# Altium PCB PCB.PcbDoc (part 1 of 2)
Units mm, origin at the board's own origin, x right, y up, seen from the top; angles counter-clockwise.
Board outline 50 x 50 mm, 8 copper layers (Top Layer, Int1, Int2, Int3, Int4, Int5, Int6, Bottom Layer), stack 1.511 mm thick; 61 components, 338 nets, 626 pads, 186 vias.
Unrouted connection lines stored in the file: 201.
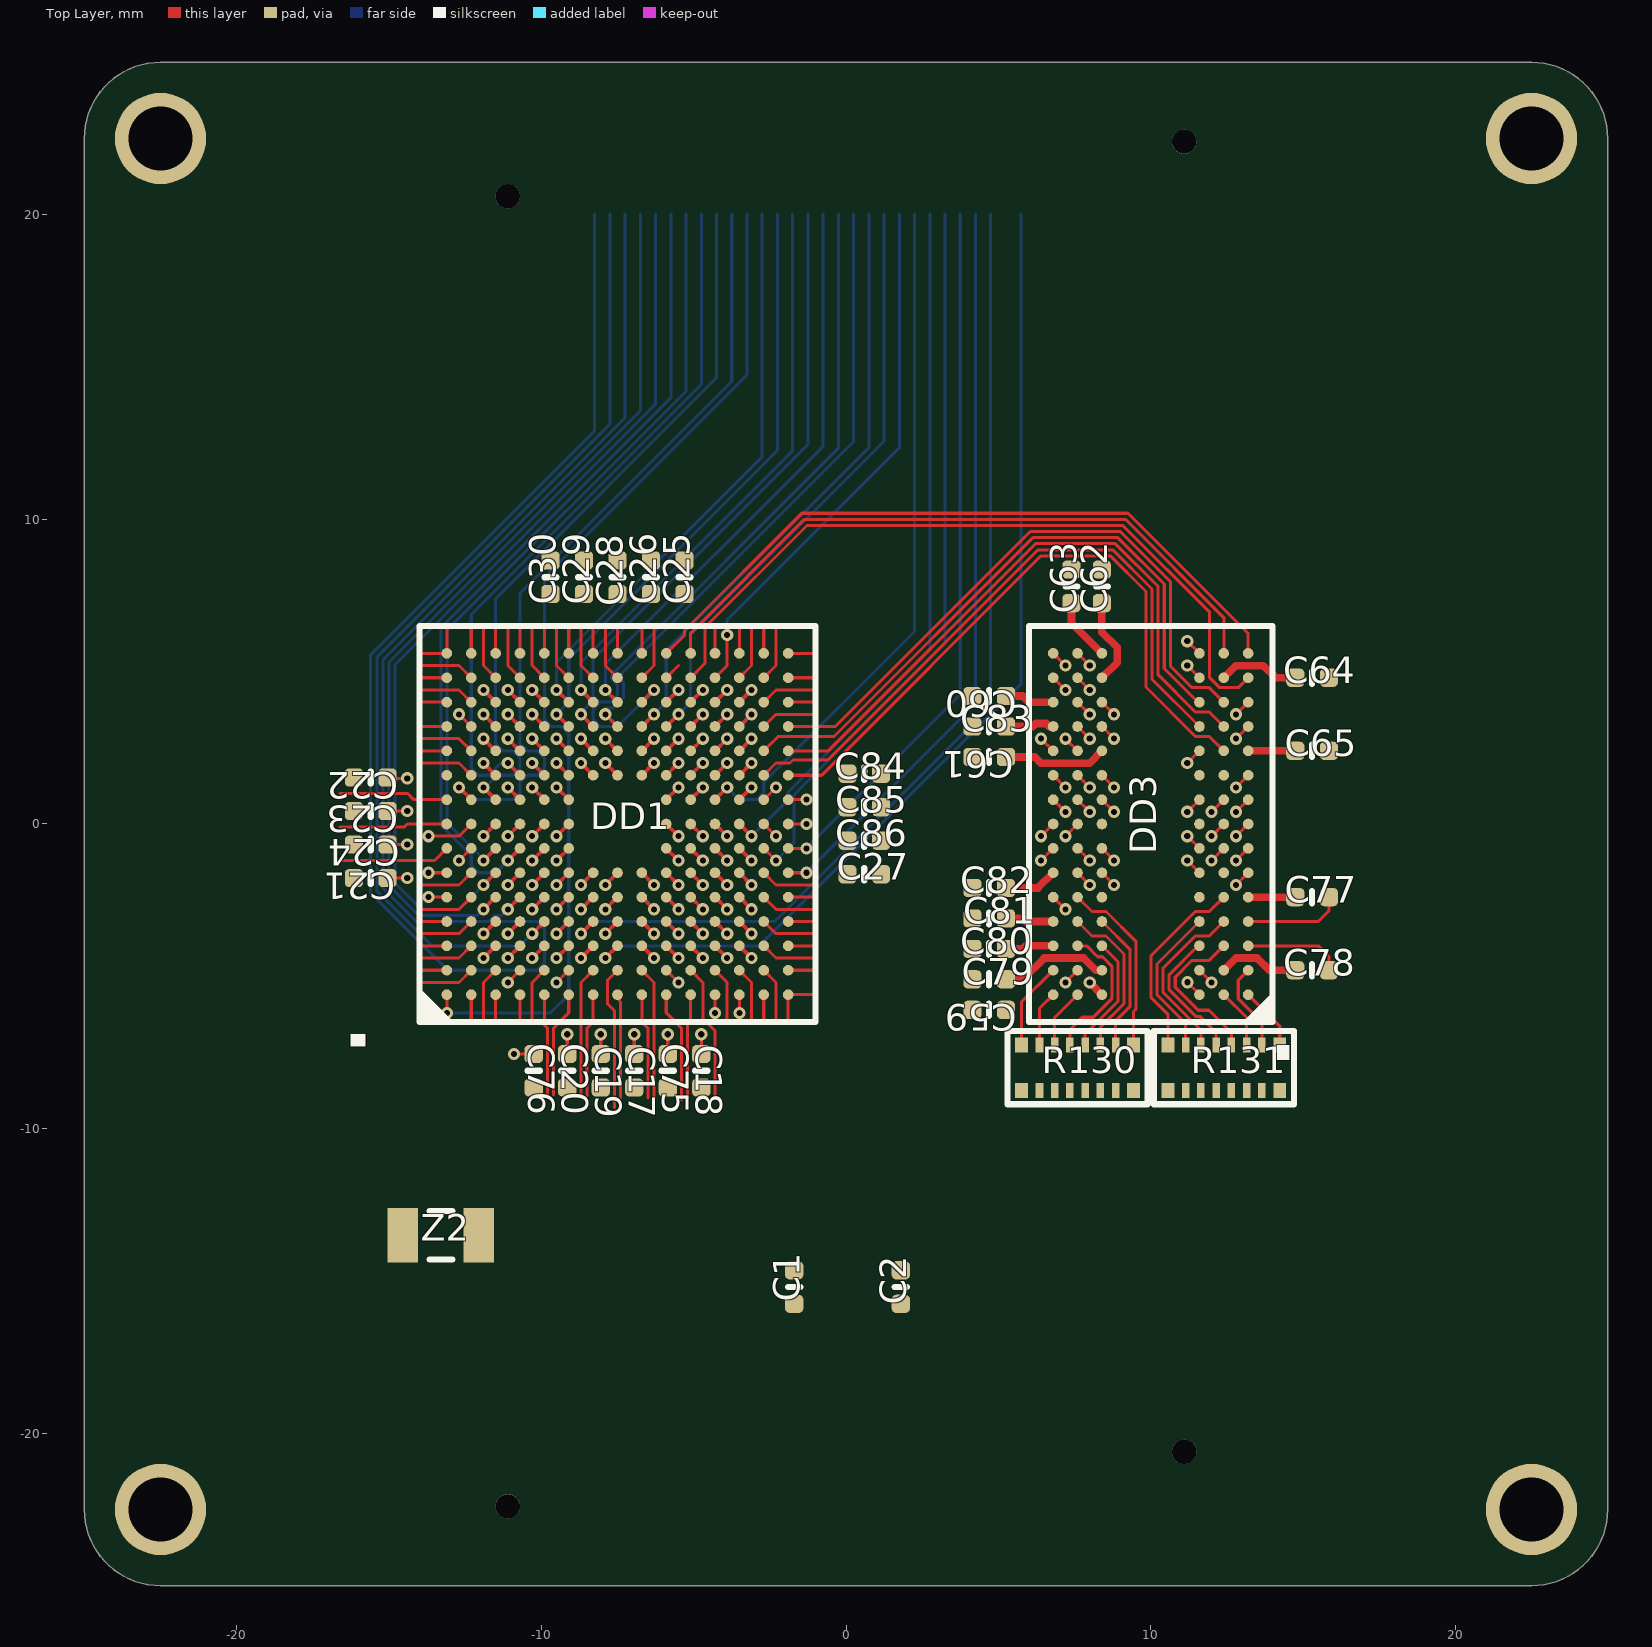
[diagram p0: Top Layer view]
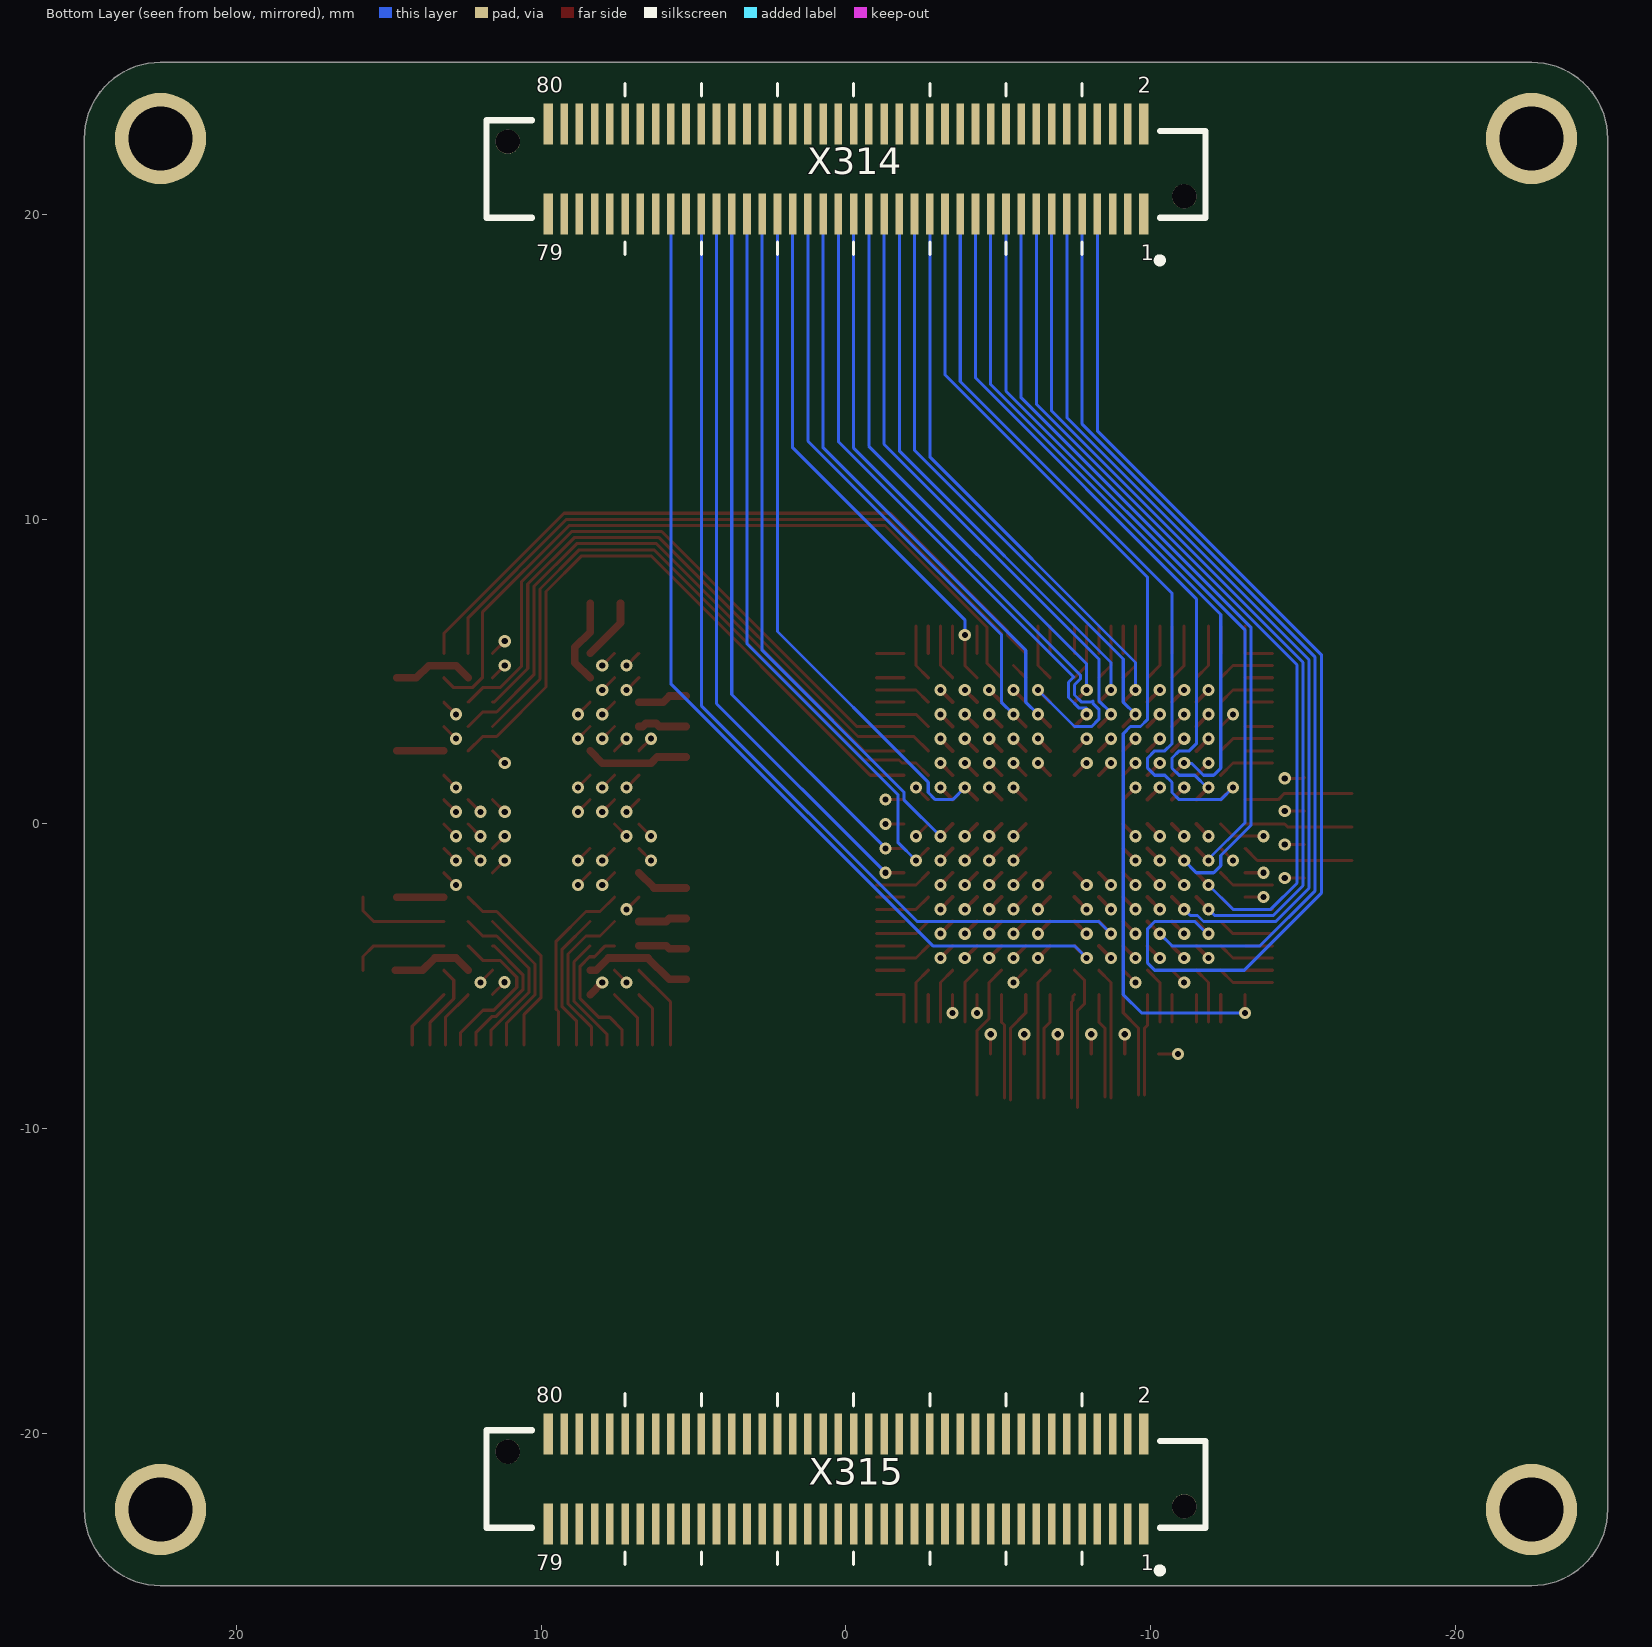
[diagram p1: Bottom Layer view, seen from below]
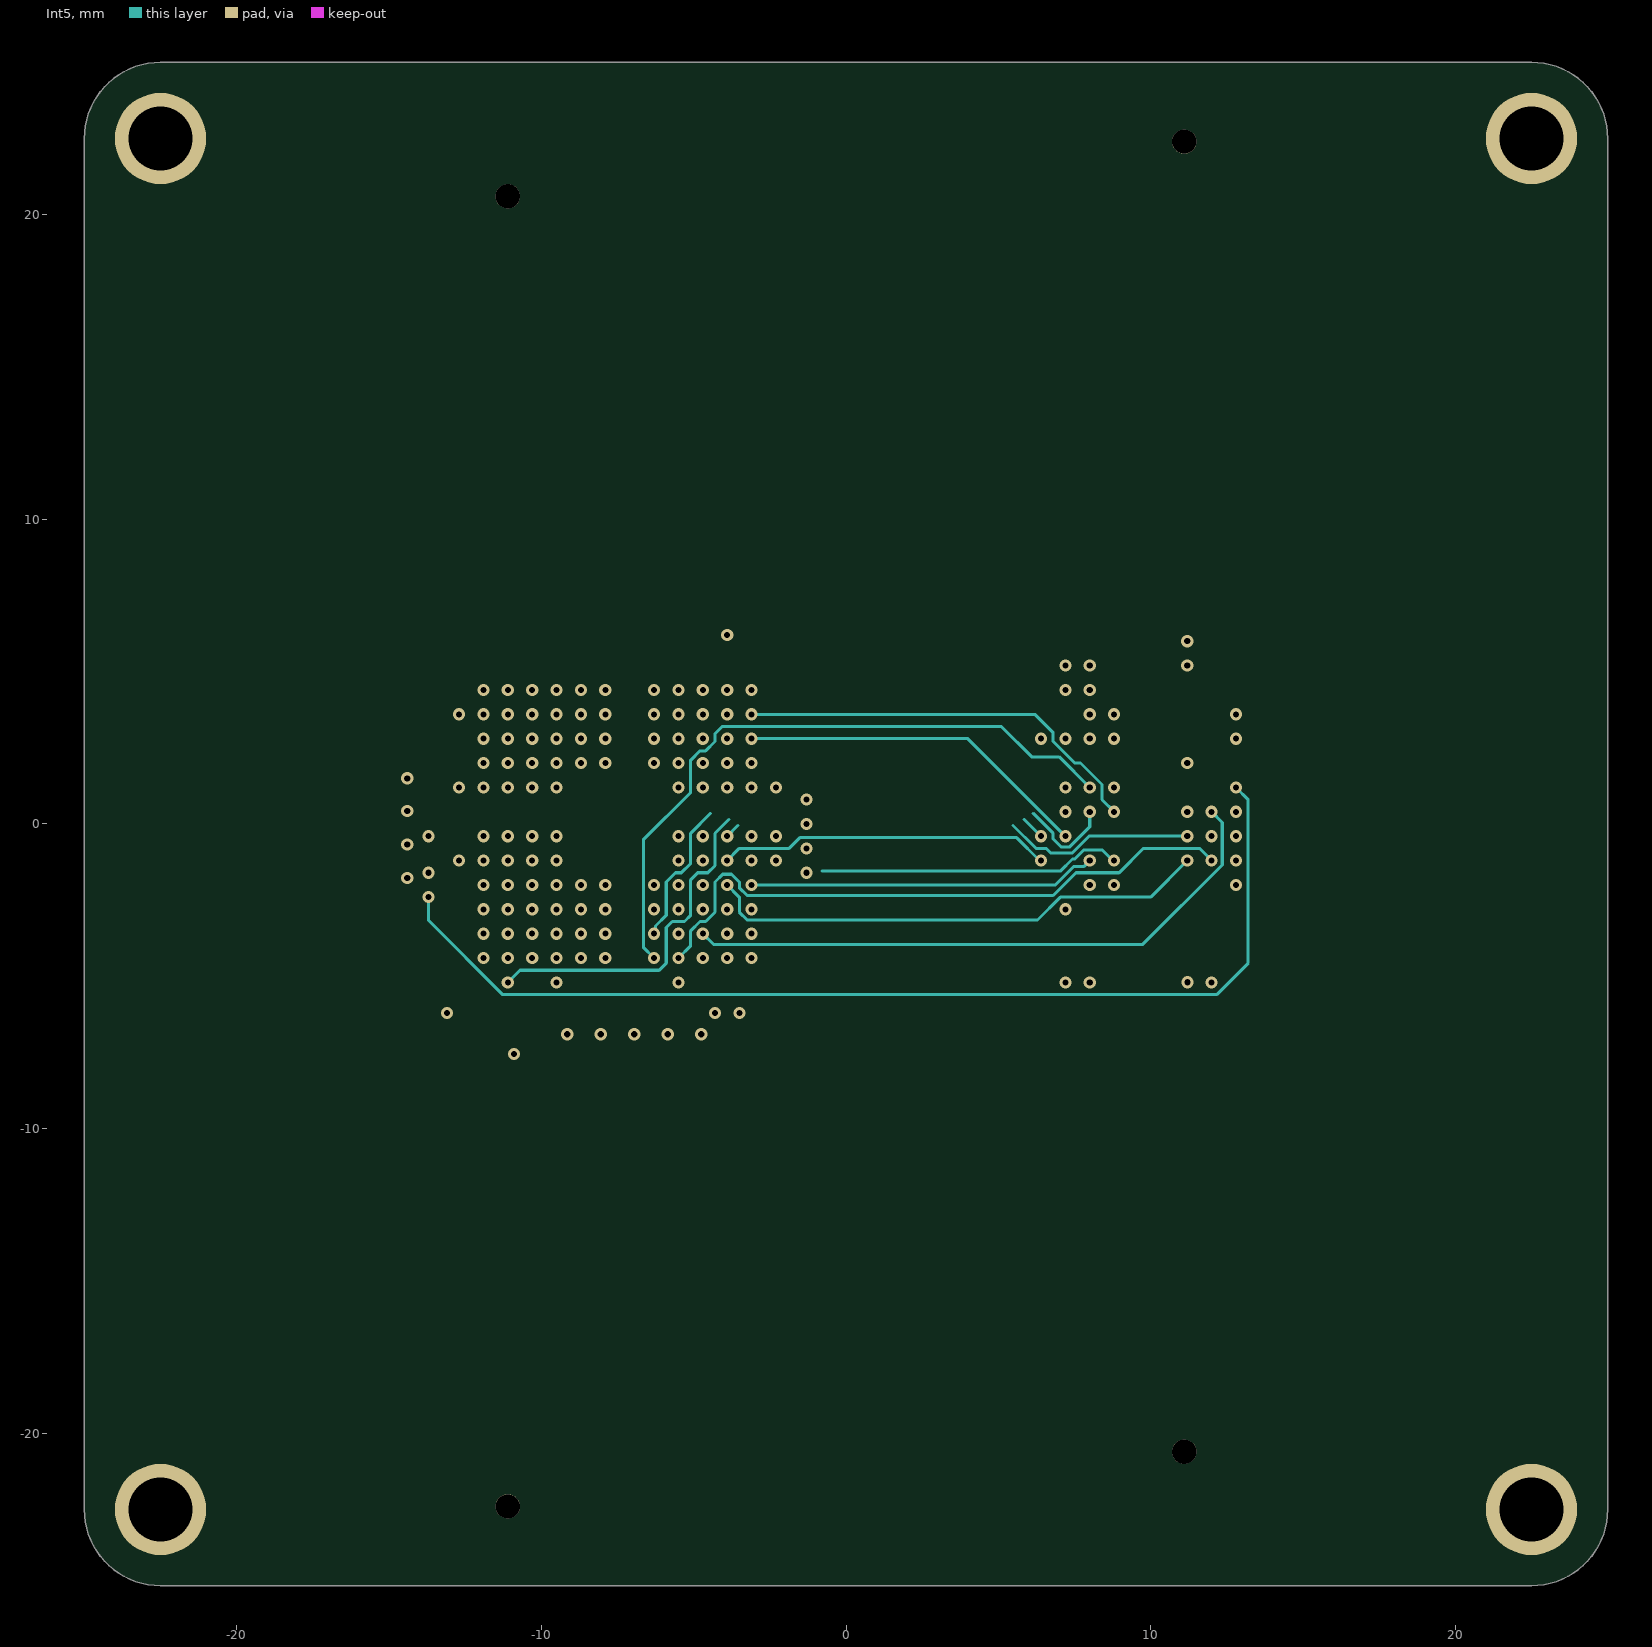
[diagram p2: Int5]

## Layer stack, top to bottom
Top Solder: solder mask 0.0254, SM-001, Dk 3.5
Top Layer: signal copper 0.018
PP1: prepreg 0.1168, PP-016, Dk 4.4
Int1: signal copper 0.018
Core1: core 0.3, FR4 Tg150, Dk 4.6
Int2: signal copper 0.018
Dielectric 1: prepreg 0.1168, PP-016, Dk 4.4
Int3: signal copper 0.018
Core2: core 0.3, FR4 Tg150, Dk 4.6
Int4: signal copper 0.018
Dielectric 2: prepreg 0.1168, PP-016, Dk 4.4
Int5: signal copper 0.018
Core3: core 0.3, FR4 Tg150, Dk 4.6
Int6: signal copper 0.018
PP4: prepreg 0.1168, PP-016, Dk 4.4
Bottom Layer: signal copper 0.018
Bottom Solder: solder mask 0.0254, SM-001, Dk 3.5

## Board outline
-25,-22.5 -25,22.5 cw(c-22.5,22.5) -22.5,25 22.5,25 cw(c22.5,22.5) 25,22.5 25,-22.5 cw(c22.5,-22.5) 22.5,-25 -22.5,-25 cw(c-22.5,-22.5)

## Design rules (kind name [scope] priority, off if disabled: settings)
AcuteAngle [All] p1: minimum=3.50000000000000E+0001 checktracksonly=FALSE
BoardOutlineClearance "BoardOutlineClearance 1" [All] p1: gap=0.25 ignorepadtopadclearanceinfootprint=FALSE except(0: Arc-SplitContinuation Track-SplitContinuation SMDPad-SplitContinuation THPad-SplitContinuation Via-SplitContinuation Fill-SplitContinuation Poly-SplitContinuation Region-SplitContinuation Text-SplitContinuation) // Milling
BoardOutlineClearance "BoardOutlineClearance 2" [All] p2: gap=0.4 ignorepadtopadclearanceinfootprint=FALSE except(0: Arc-SplitContinuation Track-SplitContinuation SMDPad-SplitContinuation THPad-SplitContinuation Via-SplitContinuation Fill-SplitContinuation Poly-SplitContinuation Region-SplitContinuation Text-SplitContinuation) // V-Cut
Clearance "Clearance-2 1/2 Oz" [All] p1: gap=0.1 ignorepadtopadclearanceinfootprint=FALSE except(0.15: Arc-Fill Arc-Poly Track-Fill Track-Poly SMDPad-SMDPad SMDPad-Fill SMDPad-Poly THPad-Fill THPad-Poly Via-Fill Via-Poly Fill-Fill Fill-Poly Poly-Poly Poly-Region Poly-Text; 0.25: Arc-Hole Track-Hole SMDPad-Hole THPad-Hole Via-Hole Fill-Hole Poly-Hole Region-Hole Text-Hole) // Advance
DiffPairsRouting "DiffPairsRouting 1/2 Oz" [All] p1: maxlimit=0.254 minlimit=0.1 mostfreqgap=0.254 toplayer_minwidth=0.1 toplayer_maxwidth=0.381 toplayer_prefwidth=0.381 midlayer1_minwidth=0.1 midlayer1_maxwidth=0.381 midlayer1_prefwidth=0.381 midlayer2_minwidth=0.1 midlayer2_maxwidth=0.381 midlayer2_prefwidth=0.381 midlayer3_minwidth=0.1 midlayer3_maxwidth=0.381 midlayer3_prefwidth=0.381 midlayer4_minwidth=0.1 midlayer4_maxwidth=0.381 midlayer4_prefwidth=0.381 midlayer5_minwidth=0.1 midlayer5_maxwidth=0.381 midlayer5_prefwidth=0.381 midlayer6_minwidth=0.1 midlayer6_maxwidth=0.381 midlayer6_prefwidth=0.381 bottomlayer_minwidth=0.1 bottomlayer_maxwidth=0.381 bottomlayer_prefwidth=0.381 maxuncoupledlength=12.7
FanoutControl Fanout_BGA [IsBGA] p1: bgadir=Out bgaviamode=Centered fanoutstyle=BGA fanoutdirection=Alternating viagrid=0.025 // Fanout_BGA (Default Rule)
HoleSize "Minimum HoleSize" [IsPad] p1: absolutevalues=TRUE maxlimit=5.9 minlimit=0.6 maxpercent=80.000 minpercent=20.000
HoleSize "Minimum HoleSize VIA 2" [IsVia] p2: absolutevalues=TRUE maxlimit=5.9 minlimit=0.2 maxpercent=80.000 minpercent=20.000 // Advance
HoleToHoleClearance Hole2HoleClearance [All] p1: gap=0.25 allowstackedmicrovias=FALSE
MatchedLengths "Schematic Matched Net Lengths_5" [InNetClass('SDRAM_DQM0')] p1: tolerance=25.4 checknetsindiffpair=FALSE checkdiffpairvsdiffpair=TRUE checkxsignals=TRUE checkothers=TRUE usedelayunits=TRUE delaytolerance=10.000000
MatchedLengths "Schematic Matched Net Lengths_4" [InNetClass('SDRAM_DQM1')] p2: tolerance=25.4 checknetsindiffpair=FALSE checkdiffpairvsdiffpair=TRUE checkxsignals=TRUE checkothers=TRUE usedelayunits=TRUE delaytolerance=10.000000
MatchedLengths "Schematic Matched Net Lengths_1" [InNetClass('SDRAM_CTRL')] p3: tolerance=25.4 checknetsindiffpair=FALSE checkdiffpairvsdiffpair=TRUE checkxsignals=TRUE checkothers=TRUE usedelayunits=TRUE delaytolerance=10.000000
MatchedLengths "Schematic Matched Net Lengths" [InNetClass('SDRAM_CTRL')] p4: tolerance=25.4 checknetsindiffpair=FALSE checkdiffpairvsdiffpair=TRUE checkxsignals=TRUE checkothers=TRUE usedelayunits=TRUE delaytolerance=10.000000
MinimumAnnularRing "Minimum AR VIA Advance" [IsVia] p1: minimumring=0.1
MinimumAnnularRing "Minimum AR PAD Advance" [IsPAD] p2: minimumring=0.15
MinimumSolderMaskSliver "SolderMask Bridge Advance" [All] p1: minsoldermaskwidth=0.1 // Mask LDI
PlaneClearance "PlaneClearance-2 1/2 Oz" [All] p1: clearance=0.15 // Advance
PlaneConnect "TermalConnect-2 1/2 Oz" [All] p1: pad.planeconnectstyle=Relief pad.reliefexpansion=0.15 pad.reliefentries=4 pad.reliefconductorwidth=0.15 pad.reliefairgap=0.15 via.planeconnectstyle=Direct via.reliefexpansion=0.15 via.reliefentries=4 via.reliefconductorwidth=0.15 via.reliefairgap=0.15 // Advance
PolygonConnect "PolygonConnect-2 1/2 Oz" [All] p1: thpad.connectstyle=Relief thpad.reliefconductorwidth=0.125 thpad.reliefentries=4 thpad.polygonreliefangle="90 Angle" thpad.airgapwidth=0.15 smdpad.connectstyle=Relief smdpad.reliefconductorwidth=0.125 smdpad.reliefentries=4 smdpad.polygonreliefangle="90 Angle" smdpad.airgapwidth=0.15 via.connectstyle=Direct via.reliefconductorwidth=0.254 via.reliefentries=4 via.polygonreliefangle="90 Angle" via.airgapwidth=0.254 // Advance
RoutingCorners [All] p1 off: cornerstyle=Round minsetback=1 maxsetback=10
RoutingLayers RoutingLayers_SDRAM_ADDR [InNetClass('FMC_A[0..11]')] p1: top layer_v5=FALSE mid layer 1_v5=FALSE mid layer 2_v5=FALSE mid layer 3_v5=FALSE mid layer 4_v5=FALSE mid layer 5_v5=TRUE mid layer 6_v5=TRUE bottom layer_v5=TRUE
RoutingLayers [All] p2: top layer_v5=TRUE mid layer 1_v5=TRUE mid layer 2_v5=TRUE mid layer 3_v5=TRUE mid layer 4_v5=TRUE mid layer 5_v5=TRUE mid layer 6_v5=TRUE bottom layer_v5=TRUE
RoutingVias [All] p1: holewidth=0.2 width=0.4 viastyle="Through Hole" minholewidth=0.2 minwidth=0.4 maxholewidth=5.9 maxwidth=6.4
SilkToSilkClearance Silk2SilkClearance [All] p1 off: silktosilkclearance=0.15
SilkToSolderMaskClearance Silk2SolderMaskClearance [IsPad] p1 off: minsilkscreentomaskgap=0.15 clearancetoexposedcopper=TRUE
SolderMaskExpansion "SolderMaskExpansion LDI" [All] p1: expansion=0.025 istentingtop=FALSE // Advance
SupplyNets "Schematic Supply Nets_14" [InNet('+VBAT_ST')] p1: voltage=0.000
SupplyNets "Schematic Supply Nets_11" [InNet('GND')] p2: voltage=0.000
SupplyNets "Schematic Supply Nets_10" [InNet('+VREF')] p3: voltage=0.000
SupplyNets "Schematic Supply Nets_3" [InNet('+VDDA')] p4: voltage=0.000
SupplyNets "Schematic Supply Nets_1" [InNet('+3V3')] p5: voltage=0.000
SupplyNets "Schematic Supply Nets" [InNet('+3V3_A')] p6: voltage=0.000
UnRoutedNet [All] p1: checkbadconnections=TRUE
Width "Width 1/2 Oz" [All] p1: maxlimit=10 minlimit=0.1 preferedwidth=0.1
18 further rules are at their usual default settings.

## Classes and differential pairs
net class LTDC_R[0..7]: LTDC_R0 LTDC_R1 LTDC_R2 LTDC_R3 LTDC_R4 LTDC_R5 LTDC_R6 LTDC_R7
net class LTDC_G[0..7]: LTDC_G0 LTDC_G1 LTDC_G2 LTDC_G3 LTDC_G4 LTDC_G5 LTDC_G6 LTDC_G7
net class LTDC_B[0..7]: LTDC_B0 LTDC_B1 LTDC_B2 LTDC_B3 LTDC_B4 LTDC_B5 LTDC_B6 LTDC_B7
component class Connectors: X314 X315
net class FMC_NBL[0..1]: FMC_NBL0 FMC_NBL1
net class SDRAM_DQM1: FMC_D8 FMC_D9 FMC_D10 FMC_D11 FMC_D12 FMC_D13 FMC_D14 FMC_D15 FMC_NBL1
net class SDRAM_DQM0: FMC_D0 FMC_D1 FMC_D2 FMC_D3 FMC_D4 FMC_D5 FMC_D6 FMC_D7 FMC_NBL0
net class SDRAM_CTRL: FMC_A0 FMC_A1 FMC_A2 FMC_A3 FMC_A4 FMC_A5 FMC_A6 FMC_A7 FMC_A8 FMC_A9 FMC_A10 FMC_A11 FMC_BA0 FMC_BA1 FMC_CLK FMC_NCAS FMC_NRAS FMC_NWE FMC_SDCKE0 FMC_SDNE0
net class RGB888: LTDC_B0 LTDC_B1 LTDC_B2 LTDC_B3 LTDC_B4 LTDC_B5 LTDC_B6 LTDC_B7 LTDC_G0 LTDC_G1 LTDC_G2 LTDC_G3 LTDC_G4 LTDC_G5 LTDC_G6 LTDC_G7 LTDC_R0 LTDC_R1 LTDC_R2 LTDC_R3 LTDC_R4 LTDC_R5 LTDC_R6 LTDC_R7 PI9 PI10 PI14 PK7
net class SDMMC_D[0..3]: SDMMC_D0 SDMMC_D1 SDMMC_D2 SDMMC_D3
net class QSPI_IO[0..3]: QSPI_IO0 QSPI_IO1 QSPI_IO2 QSPI_IO3
net class FMC_D[0..15]: FMC_D0 FMC_D1 FMC_D2 FMC_D3 FMC_D4 FMC_D5 FMC_D6 FMC_D7 FMC_D8 FMC_D9 FMC_D10 FMC_D11 FMC_D12 FMC_D13 FMC_D14 FMC_D15
net class FMC_BA[0..1]: FMC_BA0 FMC_BA1
net class FMC_A[0..11]: FMC_A0 FMC_A1 FMC_A2 FMC_A3 FMC_A4 FMC_A5 FMC_A6 FMC_A7 FMC_A8 FMC_A9 FMC_A10 FMC_A11
component class STM: C1 C2 C12 C13 C14 C15 C16 C17 C18 C19 C20 C21 C22 C23 C24 C25 C26 C27 C28 C29 C30 C31 C32 C73 C74 C75 C76 C84 C85 C86 DD1 L5 R1 R2 R3 R4 R5 R8 R56 X2 Z1 Z2
component class SDRAM: C59 C60 C61 C62 C63 C64 C65 C77 C78 C79 C80 C81 C82 C83 DD3 R130 R131

## Components (designator, comment, footprint, x,y, rotation, side; value= is the part's Value field where it differs from the comment)
C1 "Конденсатор керам. ЧИП X5R, 10%, 0402, 0.1 мкФ" "Capacitor 0402" -1.7,-15.2 r90 top
C2 "Конденсатор керам. ЧИП X5R, 10%, 0402, 0.1 мкФ" "Capacitor 0402" 1.8,-15.2 r90 top
C12 "Конденсатор керам. ЧИП X5R, 10%, 0603, 1 мкФ" "Capacitor 0603" 90.5,-17.6 r90 top
C13 "Конденсатор керам. ЧИП X7R, 10%, 0603, 0.1 мкФ" "Capacitor 0603" 90.5,-21.1 r270 top
C14 "Конденсатор керам. ЧИП NPO, 5%, 0603, 20 пФ" "Capacitor 0603" 94.5,-17.6 r270 top
C15 "Конденсатор керам. ЧИП NPO, 5%, 0603, 20 пФ" "Capacitor 0603" 92.5,-21.1 r270 top
C16 "Конденсатор керам. ЧИП X5R, 10%, 0402, 0.1 мкФ" "Capacitor 0402" 76.5,-16.1 r90 top
C17 "Конденсатор керам. ЧИП X5R, 10%, 0402, 0.1 мкФ" "Capacitor 0402" -6.95,-8.1 r270 top
C18 "Конденсатор керам. ЧИП X5R, 10%, 0402, 0.1 мкФ" "Capacitor 0402" -4.75,-8.1 r270 top
C19 "Конденсатор керам. ЧИП X5R, 10%, 0402, 0.1 мкФ" "Capacitor 0402" -8.05,-8.1 r270 top
C20 "Конденсатор керам. ЧИП X5R, 10%, 0402, 0.1 мкФ" "Capacitor 0402" -9.15,-8.1 r270 top
C21 "Конденсатор керам. ЧИП X5R, 10%, 0402, 0.1 мкФ" "Capacitor 0402" -15.6,-1.775 r180 top
C22 "Конденсатор керам. ЧИП X5R, 10%, 0402, 0.1 мкФ" "Capacitor 0402" -15.6,1.525 r180 top
C23 "Конденсатор керам. ЧИП X5R, 10%, 0402, 0.1 мкФ" "Capacitor 0402" -15.6,0.425 r180 top
C24 "Конденсатор керам. ЧИП X5R, 10%, 0402, 0.1 мкФ" "Capacitor 0402" -15.6,-0.675 r180 top
C25 "Конденсатор керам. ЧИП X5R, 10%, 0402, 0.1 мкФ" "Capacitor 0402" -5.3,8.1 r90 top
C26 "Конденсатор керам. ЧИП X5R, 10%, 0402, 0.1 мкФ" "Capacitor 0402" -6.4,8.1 r90 top
C27 "Конденсатор керам. ЧИП X5R, 10%, 0402, 0.1 мкФ" "Capacitor 0402" 0.6,-1.65 r0 top
C28 "Конденсатор керам. ЧИП X5R, 10%, 0402, 0.1 мкФ" "Capacitor 0402" -7.5,8.1 r90 top
C29 "Конденсатор керам. ЧИП X5R, 10%, 0402, 0.1 мкФ" "Capacitor 0402" -8.6,8.1 r90 top
C30 "Конденсатор керам. ЧИП X5R, 10%, 0402, 0.1 мкФ" "Capacitor 0402" -9.7,8.1 r90 top
C31 "Конденсатор керам. ЧИП Х5R, 10%, 0603 2.2 мкФ" "Capacitor 0603" 74.5,-16.1 r90 top
C32 "Конденсатор керам. ЧИП Х5R, 10%, 0603 2.2 мкФ" "Capacitor 0603" 84.095,-24.6 r270 top
C59 "Конденсатор керам. ЧИП X5R, 10%, 0402, 0.1 мкФ" "Capacitor 0402" 4.7,-6.1 r180 top
C60 "Конденсатор керам. ЧИП X5R, 10%, 0402, 0.1 мкФ" "Capacitor 0402" 4.7,4.2 r180 top
C61 "Конденсатор керам. ЧИП X5R, 10%, 0402, 0.1 мкФ" "Capacitor 0402" 4.7,2.2 r180 top
C62 "Конденсатор керам. ЧИП X5R, 10%, 0402, 0.1 мкФ" "Capacitor 0402" 8.4,7.8 r90 top
C63 "Конденсатор керам. ЧИП X5R, 10%, 0402, 0.1 мкФ" "Capacitor 0402" 7.4,7.8 r90 top
C64 "Конденсатор керам. ЧИП X5R, 10%, 0402, 0.1 мкФ" "Capacitor 0402" 15.3,4.8 r0 top
C65 "Конденсатор керам. ЧИП X5R, 10%, 0402, 0.1 мкФ" "Capacitor 0402" 15.3,2.4 r0 top
C73 "Конденсатор керам. ЧИП X5R, 10%, 0603, 1 мкФ" "Capacitor 0603" 88.5,-17.6 r90 top
C74 "Конденсатор керам. ЧИП X7R, 10%, 0603, 0.1 мкФ" "Capacitor 0603" 88.5,-21.1 r270 top
C75 "Конденсатор керам. ЧИП X5R, 10%, 0402, 0.1 мкФ" "Capacitor 0402" -5.85,-8.1 r270 top
C76 "Конденсатор керам. ЧИП X5R, 10%, 0402, 0.1 мкФ" "Capacitor 0402" -10.25,-8.1 r270 top
C77 "Конденсатор керам. ЧИП X5R, 10%, 0402, 0.1 мкФ" "Capacitor 0402" 15.3,-2.4 r0 top
C78 "Конденсатор керам. ЧИП X5R, 10%, 0402, 0.1 мкФ" "Capacitor 0402" 15.3,-4.8 r0 top
C79 "Конденсатор керам. ЧИП X5R, 10%, 0402, 0.1 мкФ" "Capacitor 0402" 4.7,-5.1 r180 top
C80 "Конденсатор керам. ЧИП X5R, 10%, 0402, 0.1 мкФ" "Capacitor 0402" 4.7,-4.1 r180 top
C81 "Конденсатор керам. ЧИП X5R, 10%, 0402, 0.1 мкФ" "Capacitor 0402" 4.7,-3.1 r180 top
C82 "Конденсатор керам. ЧИП X5R, 10%, 0402, 0.1 мкФ" "Capacitor 0402" 4.7,-2.1 r180 top
C83 "Конденсатор керам. ЧИП X5R, 10%, 0402, 0.1 мкФ" "Capacitor 0402" 4.7,3.2 r180 top
C84 "Конденсатор керам. ЧИП X5R, 10%, 0402, 0.1 мкФ" "Capacitor 0402" 0.6,1.65 r0 top
C85 "Конденсатор керам. ЧИП X5R, 10%, 0402, 0.1 мкФ" "Capacitor 0402" 0.6,0.55 r0 top
C86 "Конденсатор керам. ЧИП X5R, 10%, 0402, 0.1 мкФ" "Capacitor 0402" 0.6,-0.55 r0 top
DD1 "Микросхема STM32F746NGH6" STM-TFBGA216 -7.5,0 r90 top locked
DD3 "Микросхема IS42S32400F-6BL" BGA90C80P9X15_800X1300X120 10,0 r180 top locked
L5 "Дроссель BLM18HE152SN1D" BLM18HE152SN1D 86,-17.6 r270 top
R1 "" SMD_0402 41.5,-24.4 r0 top
R2 "" SMD_0402 44.7,-24.4 r0 top
R3 "" SMD_0402 48,-24.4 r0 top
R4 "" SMD_0402 51.3,-24.4 r0 top
R5 "" SMD_0402 27.5,-23.9 r90 top
R8 "" SMD_0402 77,-20.55 r90 top
R56 "Резистор ЧИП 0.063 Вт, 0603, 5%, 0 Ом" "Resistor 0603" 83.5,-17.6 r270 top
R130 "8-Resistor" RESNET_1506-16_CONVEX 7.6,-8 r270 top
R131 "8-Resistor" RESNET_1506-16_CONVEX 12.4,-8 r270 top
X2 "Вилка WF-6" WF-6 56.78,24.6 r180 top
X314 "" AXK6F80337YG 0,21.5 r270 bottom locked
X315 "" AXK6F80337YG 0,-21.5 r270 bottom locked
Z1 "Резонатор ABM11-25.000MHZ-D2X-T3" ABM11-MFG 95,-20.6 r90 top
Z2 "Резонатор NX3215SA 32.768 кГц" FP-NX3215SA-MFG -13.3,-13.5 r0 top

## Footprints (in the part's own frame and the unit in brackets; to place one, negate y for a bottom-side part, rotate by r counter-clockwise, add the part's x,y. Pads: shape width x height; smd on the part's side, far side on the other; paste and mask are expansions set on the pad)
ABM11-MFG [mm]
  rect 0.75x0.65 smd paste+0 mask+0: 1(-0.65,-0.5) 2(0.65,-0.5) 3(0.65,0.5) 4(-0.65,0.5)
  silkscreen extent -1.72,-1.22 1.08,1.22, body extent -1.17,-0.97 1.17,0.97, height 0.25
AXK6F80337YG [mm]
  rect 1.35x0.3 smd mask+0.05: 1(1.475,9.775) 2(-1.475,9.775) 79(1.475,-9.775) 80(-1.475,-9.775)
  rect 1.35x0.25 smd mask+0.05: 3(1.475,9.25) 4(-1.475,9.25) 5(1.475,8.75) 6(-1.475,8.75) 7(1.475,8.25) 8(-1.475,8.25) 9(1.475,7.75) 10(-1.475,7.75) 11(1.475,7.25) 12(-1.475,7.25) 13(1.475,6.75) 14(-1.475,6.75) 15(1.475,6.25) 16(-1.475,6.25) 17(1.475,5.75) 18(-1.475,5.75) 19(1.475,5.25) 20(-1.475,5.25) 21(1.475,4.75) 22(-1.475,4.75) 23(1.475,4.25) 24(-1.475,4.25) 25(1.475,3.75) 26(-1.475,3.75) 27(1.475,3.25) 28(-1.475,3.25) 29(1.475,2.75) 30(-1.475,2.75) 31(1.475,2.25) 32(-1.475,2.25) 33(1.475,1.75) 34(-1.475,1.75) 35(1.475,1.25) 36(-1.475,1.25) 37(1.475,0.75) 38(-1.475,0.75) 39(1.475,0.25) 40(-1.475,0.25) 41(1.475,-0.25) 42(-1.475,-0.25) 43(1.475,-0.75) 44(-1.475,-0.75) 45(1.475,-1.25) 46(-1.475,-1.25) 47(1.475,-1.75) 48(-1.475,-1.75) 49(1.475,-2.25) 50(-1.475,-2.25) 51(1.475,-2.75) 52(-1.475,-2.75) 53(1.475,-3.25) 54(-1.475,-3.25) 55(1.475,-3.75) 56(-1.475,-3.75) 57(1.475,-4.25) 58(-1.475,-4.25) 59(1.475,-4.75) 60(-1.475,-4.75) 61(1.475,-5.25) 62(-1.475,-5.25) 63(1.475,-5.75) 64(-1.475,-5.75) 65(1.475,-6.25) 66(-1.475,-6.25) 67(1.475,-6.75) 68(-1.475,-6.75) 69(1.475,-7.25) 70(-1.475,-7.25) 71(1.475,-7.75) 72(-1.475,-7.75) 73(1.475,-8.25) 74(-1.475,-8.25) 75(1.475,-8.75) 76(-1.475,-8.75) 77(1.475,-9.25) 78(-1.475,-9.25)
  round 0.8 hole 0.8 unplated: H1(0.9,11.1) H2(-0.9,-11.1)
  silkscreen extent -2.8,-11.8 3.1,11.8
BGA90C80P9X15_800X1300X120 [mm] "BGA, 90-Leads, Body 8,00x13,00mmx1,20mm, Pitch 0,80mm"
  round 0.35 smd: A1(-3.2,5.6) A2(-2.4,5.6) A3(-1.6,5.6) A7(1.6,5.6) A8(2.4,5.6) A9(3.2,5.6) B1(-3.2,4.8) B2(-2.4,4.8) B3(-1.6,4.8) B7(1.6,4.8) B8(2.4,4.8) B9(3.2,4.8) C1(-3.2,4) C2(-2.4,4) C3(-1.6,4) C7(1.6,4) C8(2.4,4) C9(3.2,4) D1(-3.2,3.2) D2(-2.4,3.2) D3(-1.6,3.2) D7(1.6,3.2) D8(2.4,3.2) D9(3.2,3.2) E1(-3.2,2.4) E2(-2.4,2.4) E3(-1.6,2.4) E7(1.6,2.4) E8(2.4,2.4) E9(3.2,2.4) F1(-3.2,1.6) F2(-2.4,1.6) F3(-1.6,1.6) F7(1.6,1.6) F8(2.4,1.6) F9(3.2,1.6) G1(-3.2,0.8) G2(-2.4,0.8) G3(-1.6,0.8) G7(1.6,0.8) G8(2.4,0.8) G9(3.2,0.8) H1(-3.2,0) H2(-2.4,0) H3(-1.6,0) H7(1.6,0) H8(2.4,0) H9(3.2,0) J1(-3.2,-0.8) J2(-2.4,-0.8) J3(-1.6,-0.8) J7(1.6,-0.8) J8(2.4,-0.8) J9(3.2,-0.8) K1(-3.2,-1.6) K2(-2.4,-1.6) K3(-1.6,-1.6) K7(1.6,-1.6) K8(2.4,-1.6) K9(3.2,-1.6) L1(-3.2,-2.4) L2(-2.4,-2.4) L3(-1.6,-2.4) L7(1.6,-2.4) L8(2.4,-2.4) L9(3.2,-2.4) M1(-3.2,-3.2) M2(-2.4,-3.2) M3(-1.6,-3.2) M7(1.6,-3.2) M8(2.4,-3.2) M9(3.2,-3.2) N1(-3.2,-4) N2(-2.4,-4) N3(-1.6,-4) N7(1.6,-4) N8(2.4,-4) N9(3.2,-4) P1(-3.2,-4.8) P2(-2.4,-4.8) P3(-1.6,-4.8) P7(1.6,-4.8) P8(2.4,-4.8) P9(3.2,-4.8) R1(-3.2,-5.6) R2(-2.4,-5.6) R3(-1.6,-5.6) R7(1.6,-5.6) R8(2.4,-5.6) R9(3.2,-5.6)
  silkscreen extent -4,-6.5 4,6.5, body extent -4,-6.5 4,6.5, height 1.2
BLM18HE152SN1D [mm]
  rect 0.65x0.7 smd paste+0 mask+0: 1(-0.675,0) 2(0.675,0)
  silkscreen extent -0.88,-0.73 0.88,0.73, body extent -1.1,-0.58 1.1,0.58, height 0.25
"Capacitor 0402" [mm]
  rrect50% 0.6x0.6 smd: 1(-0.55,0) 2(0.55,0)
  silkscreen extent 0,-0.2 0,0.2, body extent -0.5,-0.25 0.5,0.25, height 0.53
"Capacitor 0603" [mm]
  rrect50% 0.85x0.85 smd: 1(-0.7,0) 2(0.7,0)
  silkscreen extent -1.32,-0.63 1.32,0.63, body extent -0.8,-0.4 0.8,0.4, height 0.65
FP-NX3215SA-MFG [mm]
  rect 1x1.8 smd paste+0 mask+0: 1(-1.25,0) 2(1.25,0)
  silkscreen extent -0.38,-0.8 0.38,0.8, body extent -1.85,-1 1.85,1, height 0.25
"Resistor 0603" [mm]
  rrect50% 0.85x0.85 smd: 1(-0.7,0) 2(0.7,0)
  silkscreen extent -1.32,-0.62 1.32,0.62, body extent -0.95,-0.4 0.95,0.4, height 0.45
RESNET_1506-16_CONVEX [mm] "Array Chip Resistor, 16 leads, 8 resistors, Body 3.8x1.6mm Height 0.55mm"
  rect 0.5x0.425 smd mask+0.032: 1(-0.75,1.837) 8(-0.75,-1.837) 9(0.75,-1.837) 16(0.75,1.837)
  rect 0.5x0.25 smd mask+0.032: 2(-0.75,1.25) 4(-0.75,0.25) 5(-0.75,-0.25) 6(-0.75,-0.75) 7(-0.75,-1.25) 10(0.75,-1.25) 11(0.75,-0.75) 12(0.75,-0.25) 13(0.75,0.25) 15(0.75,1.25)
  rect 0.5x0.25 smd paste+0 mask+0.032: 3(-0.75,0.75) 14(0.75,0.75)
  silkscreen extent -1.2,-2.3 1.2,2.3, body extent -0.82,-1.95 0.83,1.95, height 0.51
SMD_0402 [mm]
  rect 0.6x0.6 smd: 1(-0.5,0) 2(0.5,0)
  silkscreen extent 0,-0.2 0,0.2, body extent -0.6,-0.25 0.6,0.25, height 0.36
STM-TFBGA216 [mm] "BGA, 216-Balls, Body 13x13mm, Pitch 0.8mm"
  round 0.35 smd: A1(-5.6,5.6) A2(-4.8,5.6) A3(-4,5.6) A4(-3.2,5.6) A5(-2.4,5.6) A6(-1.6,5.6) A7(-0.8,5.6) A8(0,5.6) A9(0.8,5.6) A10(1.6,5.6) A11(2.4,5.6) A12(3.2,5.6) A13(4,5.6) A14(4.8,5.6) A15(5.6,5.6) B1(-5.6,4.8) B2(-4.8,4.8) B3(-4,4.8) B4(-3.2,4.8) B5(-2.4,4.8) B6(-1.6,4.8) B7(-0.8,4.8) B8(0,4.8) B9(0.8,4.8) B10(1.6,4.8) B11(2.4,4.8) B12(3.2,4.8) B13(4,4.8) B14(4.8,4.8) B15(5.6,4.8) C1(-5.6,4) C2(-4.8,4) C3(-4,4) C4(-3.2,4) C5(-2.4,4) C6(-1.6,4) C7(-0.8,4) C8(0,4) C9(0.8,4) C10(1.6,4) C11(2.4,4) C12(3.2,4) C13(4,4) C14(4.8,4) C15(5.6,4) D1(-5.6,3.2) D2(-4.8,3.2) D3(-4,3.2) D4(-3.2,3.2) D5(-2.4,3.2) D6(-1.6,3.2) D7(-0.8,3.2) D8(0,3.2) D9(0.8,3.2) D10(1.6,3.2) D11(2.4,3.2) D12(3.2,3.2) D13(4,3.2) D14(4.8,3.2) D15(5.6,3.2) E1(-5.6,2.4) E2(-4.8,2.4) E3(-4,2.4) E4(-3.2,2.4) E5(-2.4,2.4) E6(-1.6,2.4) E7(-0.8,2.4) E8(0,2.4) E9(0.8,2.4) E10(1.6,2.4) E11(2.4,2.4) E12(3.2,2.4) E13(4,2.4) E14(4.8,2.4) E15(5.6,2.4) F1(-5.6,1.6) F2(-4.8,1.6) F3(-4,1.6) F4(-3.2,1.6) F5(-2.4,1.6) F6(-1.6,1.6) F7(-0.8,1.6) F8(0,1.6) F9(0.8,1.6) F10(1.6,1.6) F11(2.4,1.6) F12(3.2,1.6) F13(4,1.6) F14(4.8,1.6) F15(5.6,1.6) G1(-5.6,0.8) G2(-4.8,0.8) G3(-4,0.8) G4(-3.2,0.8) G5(-2.4,0.8) G6(-1.6,0.8) G10(1.6,0.8) G11(2.4,0.8) G12(3.2,0.8) G13(4,0.8) G14(4.8,0.8) G15(5.6,0.8) H1(-5.6,0) H2(-4.8,0) H3(-4,0) H4(-3.2,0) H5(-2.4,0) H6(-1.6,0) H10(1.6,0) H11(2.4,0) H12(3.2,0) H13(4,0) H14(4.8,0) H15(5.6,0) J1(-5.6,-0.8) J2(-4.8,-0.8) J3(-4,-0.8) J4(-3.2,-0.8) J5(-2.4,-0.8) J6(-1.6,-0.8) J10(1.6,-0.8) J11(2.4,-0.8) J12(3.2,-0.8) J13(4,-0.8) J14(4.8,-0.8) J15(5.6,-0.8) K1(-5.6,-1.6) K2(-4.8,-1.6) K3(-4,-1.6) K4(-3.2,-1.6) K5(-2.4,-1.6) K6(-1.6,-1.6) K7(-0.8,-1.6) K8(0,-1.6) K9(0.8,-1.6) K10(1.6,-1.6) K11(2.4,-1.6) K12(3.2,-1.6) K13(4,-1.6) K14(4.8,-1.6) K15(5.6,-1.6) L1(-5.6,-2.4) L2(-4.8,-2.4) L3(-4,-2.4) L4(-3.2,-2.4) L5(-2.4,-2.4) L6(-1.6,-2.4) L7(-0.8,-2.4) L8(0,-2.4) L9(0.8,-2.4) L10(1.6,-2.4) L11(2.4,-2.4) L12(3.2,-2.4) L13(4,-2.4) L14(4.8,-2.4) L15(5.6,-2.4) M1(-5.6,-3.2) M2(-4.8,-3.2) M3(-4,-3.2) M4(-3.2,-3.2) M5(-2.4,-3.2) M6(-1.6,-3.2) M7(-0.8,-3.2) M8(0,-3.2) M9(0.8,-3.2) M10(1.6,-3.2) M11(2.4,-3.2) M12(3.2,-3.2) M13(4,-3.2) M14(4.8,-3.2) M15(5.6,-3.2) N1(-5.6,-4) N2(-4.8,-4) N3(-4,-4) N4(-3.2,-4) N5(-2.4,-4) N6(-1.6,-4) N7(-0.8,-4) N8(0,-4) N9(0.8,-4) N10(1.6,-4) N11(2.4,-4) N12(3.2,-4) N13(4,-4) N14(4.8,-4) N15(5.6,-4) P1(-5.6,-4.8) P2(-4.8,-4.8) P3(-4,-4.8) P4(-3.2,-4.8) P5(-2.4,-4.8) P6(-1.6,-4.8) P7(-0.8,-4.8) P8(0,-4.8) P9(0.8,-4.8) P10(1.6,-4.8) P11(2.4,-4.8) P12(3.2,-4.8) P13(4,-4.8) P14(4.8,-4.8) P15(5.6,-4.8) R1(-5.6,-5.6) R2(-4.8,-5.6) R3(-4,-5.6) R4(-3.2,-5.6) R5(-2.4,-5.6) R6(-1.6,-5.6) R7(-0.8,-5.6) R8(0,-5.6) R9(0.8,-5.6) R10(1.6,-5.6) R11(2.4,-5.6) R12(3.2,-5.6) R13(4,-5.6) R14(4.8,-5.6) R15(5.6,-5.6)
  silkscreen extent -6.5,-6.5 6.5,6.5, body extent -6.5,-6.5 6.5,6.5, height 1.1
WF-6 [mm]
  rect 2.1x2.1 hole 1: 1(0,0)
  round 2.1 hole 1: 2(2.54,0) 3(5.08,0) 4(7.62,0) 5(10.16,0) 6(12.7,0)
  silkscreen extent -1.27,-2.4 13.97,3.4, body extent -1.27,-2.4 13.97,3.4, height 11.55

## Part data
C1 C2 C16 C17 C18 C19 C20 C21 C22 C23 C24 C25 C26 C27 C28 C29 C30 C59 C60 C61 C62 C63 C64 C65 C75 C76 C77 C78 C79 C80 C81 C82 C83 C84 C85 C86: library part 000821-3, "Cap Ceramic 0.1uF 50V X5R 10% Pad SMD 0402 85C T/R", Capacitance=100nF, Case=0402, Dielectric=X5R, Manufacturer="Murata Manufacturing", Manufacturer Part Number=GRM155R61H104KE14J, Tolerance=10%, Voltage=50V, Device=100nFx50V, Help URL=https://www.digikey.com/en/products/detail/murata-electronics/GRM155R61H104KE14J/4905153, Info=100nFx50V, PCAD Reader Code=0, Pin Count=2, Storage Code=0
C12 C73: library part 000825-4, "Multilayer Ceramic Capacitors MLCC - SMD/SMT 0603 50V 1.0uF X5R 10%", Capacitance=1µF, Case=0603, Dielectric=X5R, Manufacturer="Murata Electronics", Manufacturer Part Number=GRT188R61H105KE13D, Tolerance=10%, Voltage=50V, Device=1µFx50V, Help URL=https://www.digikey.com/en/products/detail/murata-electronics/GRT188R61H105KE13D/5416752, Info=1µFx50V, PCAD Reader Code=0, Pin Count=2, Storage Code=0
C13 C74: library part 000129-5, Capacitance=100nF, Case=0603, Dielectric=X7R, Manufacturer=Yageo, Manufacturer Part Number=CC0603KPX7R9BB104, Voltage=50V, Device=0.1uFx50V, Info=100nFx50V, PCAD Reader Code=6100, Pin Count=2, Storage Code=626
C14 C15: library part 000172-6, Capacitance=20pF, Case=0603, Dielectric=NPO, Manufacturer="Murata Manufacturing", Manufacturer Part Number=GRM1885C1H200J, Voltage=50V, Device=20pFx50V, Info=20pFx50V, PCAD Reader Code=10099, Pin Count=2, Storage Code=0
C31 C32: library part 000135-5, Capacitance=2.2µF, Case=0603, Dielectric=X5R, Voltage=50V, Device=2.2uFx50V, Info=2.2µFx50V, PCAD Reader Code=7573, Pin Count=2, Storage Code=632
DD1: library part STM32F746NGH6, "ARM-Based Cortex-M7 32 Bit MCU+FPU, 462 DMIPS, 1024 kB Flash, 320 kB RAM, 168 I/Os, -40 to 85 degC, 216-Pin TFBGA, Halogen-Free, Tray", Case=TFBGA-216, Manufacturer=STMicroelectronics, Device=STM32F746NGH6, Info=STM32F746NGH6, Manufacturer Part Number=STM32F746NGH6, Part Number=STM32F746NGH6, Pin Count=216
DD3: library part IS42S32400F-6BL, "128Mb (4M x 32) Synchronous DRAM", Case="90-Ball TF-BGA", Device=IS42S32400F-6BL, Info=IS42S32400F-6BL, Manufacturer Part Number=IS42S32400F-6BL, Part Number=IS42S32400F-6BL, Pin Count=90
L5: library part 000485-3, "Ferrite bead", Case=BLM18HE152SN1D, Manufacturer="Murata Electronics", Device=BLM18HE152SN1D, Help URL=http://www.farnell.com/datasheets/1851896.pdf, Info=BLM18HE152SN1D, Manufacturer Part Number=BLM18HE152SN1D, PCAD Reader Code=7562, Pin Count=2, Storage Code=907
R1 R2 R3 R4 R8: library part Resistor_0402, Part Number=Resistor_0402, Pin Count=2
R5: library part Resistor_0402, Resistance=10k, Device=10k, Info=10k, Part Number=Resistor_0402, Pin Count=2
R56: library part 000021-4, Case=0603, Manufacturer=Yageo, Manufacturer Part Number=RC0603JR-130RL, Power=63mW, Resistance=0, Tolerance=5%, Device=0, Info=0, Mounting=SMD, PCAD Reader Code=6518, Pin Count=2, Storage Code=788
R130 R131: library part EXB2HV103JV, Case=SMD-1506, Manufacturer=Panasonic, Resistance=10k, Device=10k, Info=10k, Manufacturer Part Number=EXB2HV103JV, Part Number=EXB2HV103JV, Pin Count=16
X2: library part 000311-4, Case=MOLEX_22-27-2061, Manufacturer Part Number=WF-6, Device=WF-6, Help URL=https://static.chipdip.ru/lib/276/DOC000276438.pdf, Info=WF-6, Mounting=THT, PCAD Reader Code=1115, Pin Count=6, Storage Code=1296
X314 X315: library part AXK6F80337YG, Manufacturer="Philips Semi", Device=AXK6F80337YG, Info=AXK6F80337YG, Manufacturer Part Number=AXK6F80337YG, Part Number=AXK6F80337YG, Pin Count=80, Type=Вилка
Z1: library part 000855-2, "Crystal 25MHz ±20ppm (Tol) ±20ppm (Stability) 10pF FUND 100Ohm 4-Pin Ultra Mini-CSMD T/R", Frequency=25MHz, Frequency Tolerance=20ppm, Load Capacitance=10pF, Manufacturer=Abracon, Manufacturer Part Number=ABM11-25.000MHZ-D2X-T3, Shunt Capacitance=7pF, Temperature Tolerance=50ppm, Device=25MHz, Help URL=https://www.farnell.com/datasheets/1936770.pdf, Info=ABM11-25.000MHZ-D2X-T3, PCAD Reader Code=0, Pin Count=4, Storage Code=0
Z2: library part 000601-3, "32.768kHz", Case=3215, Manufacturer=NDK, Manufacturer Part Number=NX3215SA-32.768K-STD-MUA-8, Device=32.768kHz, Frequency=32.768kHz, Help URL=https://www.compel.ru/infosheet/NDK/NX3215SA-32.768K-STD-MUA-8, Info=32.768kHz, PCAD Reader Code=10090, Pin Count=2, Storage Code=19559

## Free pads (board coordinates)
  round 3 hole 2.1: 1(22.5,-22.5) 2(22.5,22.5) 3(-22.5,22.5) 4(-22.5,-22.5)
  round 5 hole 3.5: M1(-32.5,-32.5) M2(-32.5,33) M3(93.5,33) M4(93.5,-32.5)

## Via types
v1: diameter 0.4, hole 0.2, Top Layer to Bottom Layer, tented both sides, 186 vias

## Nets (pads, with @x,y where several pads share a name; then routed paths per layer and width w, separated by ;. In a path a pad name is that pad's centre, name@x,y a point inside that pad or via, vN(x,y) a via of type N, cw(c..) or ccw(c..) an arc to the next point about the centre after c; other vN are vias at no path point)
+3V3: C59.1 C60.1 C61.1 C62.1 C63.1 C64.1 C65.1 C77.1 C78.1 C79.1 C80.1 C81.1 C82.1 C83.1 DD3.A7 DD3.B2 DD3.B7 DD3.C9 DD3.D9 DD3.E1 DD3.F9 DD3.L1 DD3.L7 DD3.M9 DD3.N9 DD3.P2 DD3.P7 DD3.R7 | length 29.2
  Top Layer w0.25: C79.1@5.25,-5.1 5.8,-5.1 6.5,-4.4 7.434,-4.4 7.766,-4.4 7.8,-4.4 8.2,-4.8 DD3.B7@8.4,-4.8 ; C80.1@5.25,-4.1 5.802,-4.1 5.902,-4 DD3.C9@6.8,-4 ; C81.1@5.25,-3.1 5.802,-3.1 5.902,-3.2 DD3.D9@6.8,-3.2 ; C82.1@5.25,-2.1 6.3,-2.1 DD3.F9@6.8,-1.6 ; C61.1@5.25,2.2 6.2,2.2 6.4,2 8,2 DD3.L7@8.4,2.4 ; C83.1@5.25,3.2 5.8,3.2 6.128,3.2 6.228,3.3 6.572,3.3 6.672,3.2 DD3.M9@6.8,3.2 ; C60.1@5.25,4.2 5.802,4.2 6.002,4 DD3.N9@6.8,4 ; C63.1@7.4,7.25 7.4,6.6 DD3.R7@8.4,5.6 ; v1(8,-5.2) DD3.A7@8.4,-5.6 ; DD3.P7@8.4,4.8 8.9,5.3 8.9,5.8 8.4,6.3 C62.1@8.4,7.25 ; DD3.B2@12.4,-4.8 12.8,-4.4 13.5,-4.4 13.9,-4.8 C78.1@14.8,-4.8 ; DD3.P2@12.4,4.8 12.8,5.2 13.7,5.2 14.1,4.8 C64.1@14.75,4.8 ; DD3.E1@13.2,-2.4 C77.1@14.75,-2.4 ; DD3.L1@13.2,2.4 C65.1@14.75,2.4
+3V3_A: C17.1 C18.1 C19.1 C20.1 C21.1 C22.1 C23.1 C24.1 C25.1 C26.1 C27.1 C28.1 C29.1 C30.1 C75.1 C76.1 C84.1 C85.1 C86.1 DD1.E7 DD1.E8 DD1.E9 DD1.E10 DD1.F4 DD1.F5 DD1.F11 DD1.G5 DD1.G11 DD1.H5 DD1.H11 DD1.J5 DD1.J11 DD1.K5 DD1.K11 DD1.L7 DD1.L8 DD1.L9 DD1.L10 L5.1 R1.2 R3.2 R8.1 | length 17.3
  Top Layer w0.1: C21.1@-15.05,-1.775 v1(-14.4,-1.775) ; C24.1@-15.05,-0.675 v1(-14.4,-0.675) ; C23.1@-15.05,0.425 v1(-14.4,0.425) ; C22.1@-15.05,1.525 -15.025,1.5 v1(-14.4,1.5) ; v1(-10.9,-7.55) C76.1@-10.25,-7.55 ; C20.1@-9.15,-7.55 v1(-9.15,-6.9) ; C19.1@-8.05,-7.55 v1(-8.05,-6.9) ; C17.1@-6.95,-7.55 v1(-6.95,-6.9) ; C75.1@-5.85,-7.55 v1(-5.85,-6.9) ; C18.1@-4.75,-7.55 v1(-4.75,-6.9)
  Top Layer w0.125: v1(-10.3,-1.2) DD1.E7@-9.9,-0.8 ; v1(-10.3,-0.4) DD1.E8@-9.9,0 ; v1(-10.3,1.2) DD1.E9@-9.9,0.8 ; v1(-10.3,2) DD1.E10@-9.9,1.6 ; v1(-9.5,-3.6) DD1.F4@-9.1,-3.2 ; v1(-9.5,-2.8) DD1.F5@-9.1,-2.4 ; v1(-9.5,2.8) DD1.F11@-9.1,2.4 ; v1(-8.7,-2.8) DD1.G5@-8.3,-2.4 ; v1(-8.7,2.8) DD1.G11@-8.3,2.4 ; v1(-7.9,-2.8) DD1.H5@-7.5,-2.4 ; v1(-7.9,2.8) DD1.H11@-7.5,2.4 ; DD1.J5@-6.7,-2.4 v1(-6.3,-2.8) ; DD1.J11@-6.7,2.4 v1(-6.3,2.8) ; DD1.K5@-5.9,-2.4 v1(-5.5,-2.8) ; DD1.K11@-5.9,2.4 v1(-5.5,2.8) ; DD1.L7@-5.1,-0.8 v1(-4.7,-1.2) ; DD1.L8@-5.1,0 v1(-4.7,-0.4) ; DD1.L9@-5.1,0.8 v1(-4.7,1.2) ; DD1.L10@-5.1,1.6 v1(-4.7,2)
+VBAT_ST: DD1.C1 | length 0.9
  Top Layer w0.1: -11.5,-6.5 DD1.C1@-11.5,-5.6
+VDDA: C73.1 C74.1 DD1.R1 L5.2 R56.2 | length 1.8
  Top Layer w0.1: -1.9,-6.5 DD1.R1@-1.9,-5.6 -1,-5.6
+VREF: C12.1 C13.1 DD1.P1 R56.1 | length 0.9
  Top Layer w0.1: -2.7,-6.5 DD1.P1@-2.7,-5.6
FMC_A0: DD1.D2 DD3.H9 | length 13.4
  Top Layer w0.1: v1(-11.1,-5.2) DD1.D2@-10.7,-4.8 ; v1(6.4,-0.4) DD3.H9@6.8,0
  Int5 w0.1: v1(-11.1,-5.2) -10.7,-4.8 -6.134,-4.8 -5.9,-4.566 -5.9,-3.4 -5.7,-3.2 -5.3,-3.2 -5.1,-3 -5.1,-1.834 -4.866,-1.6 -4.534,-1.6 -4.3,-1.366 -4.3,-0.305 -3.845,0.15 ; 5.85,0.15 v1(6.4,-0.4)
FMC_A1: DD1.E2 DD3.J3 | length 2.4
  Top Layer w0.1: -10.3,-6.5 -10.3,-5.2 DD1.E2@-9.9,-4.8 ; v1(11.2,0.4) DD3.J3@11.6,0.8
FMC_A2: DD1.G2 DD3.H2 | length 4.9
  Top Layer w0.1: -8.7,-9 -8.7,-5.2 DD1.G2@-8.3,-4.8 ; v1(12,-0.4) DD3.H2@12.4,0
FMC_A3: DD1.H2 DD3.H1 | length 5.3
  Top Layer w0.1: -7.6,-9.3 -7.6,-6.129 -7.825,-5.904 -7.825,-5.125 DD1.H2@-7.5,-4.8 ; v1(12.8,-0.4) DD3.H1@13.2,0
FMC_A4: DD1.J2 DD3.G1 | length 4.9
  Top Layer w0.1: DD1.J2@-6.7,-4.8 -6.3,-5.2 -6.3,-9 ; v1(12.8,-1.2) DD3.G1@13.2,-0.8
FMC_A5: DD1.K3 DD3.G2 | length 21.8
  Top Layer w0.1: v1(12,-1.2) DD3.G2@12.4,-0.8
  Top Layer w0.125: DD1.K3@-5.9,-4 v1(-5.5,-4.4)
  Int5 w0.1: v1(-5.5,-4.4) -5.1,-4 -5.1,-3.505 -4.795,-3.2 -4.605,-3.2 -4.3,-2.895 -4.3,-1.905 -4.045,-1.65 -3.755,-1.65 -3.5,-1.905 -3.5,-2.095 -3.245,-2.35 6.802,-2.35 7.552,-1.6 8.966,-1.6 9.766,-0.8 11.6,-0.8 v1(12,-1.2)
FMC_A6: DD1.M6 DD3.F3 | length 17.8
  Top Layer w0.1: v1(11.2,-1.2) DD3.F3@11.6,-1.6
  Top Layer w0.125: DD1.M6@-4.3,-1.6 v1(-3.9,-2)
  Int5 w0.1: v1(-3.9,-2) -3.5,-2.4 -3.5,-2.895 -3.245,-3.15 6.284,-3.15 7.034,-2.4 10,-2.4 v1(11.2,-1.2)
FMC_A7: DD1.N6 DD3.G8 | length 12.6
  Top Layer w0.1: DD3.G8@7.6,-0.8 v1(8,-1.2)
  Top Layer w0.125: DD1.N6@-3.5,-1.6 v1(-3.1,-2)
  Int5 w0.1: v1(-3.1,-2) 6.869,-2 7.469,-1.4 7.8,-1.4 v1(8,-1.2)
FMC_A8: DD1.P6 DD3.F7 | length 2.4
  Top Layer w0.1: DD1.P6@-2.7,-1.6 -2.3,-2 -1,-2 ; DD3.F7@8.4,-1.6 v1(8.8,-2)
FMC_A9: DD1.M8 DD3.G3 | length 7.9
  Top Layer w0.1: v1(11.2,-0.4) DD3.G3@11.6,-0.8
  Top Layer w0.125: DD1.M8@-4.3,0 v1(-3.9,-0.4)
  Int5 w0.1: v1(-3.9,-0.4) -3.55,-0.05 ; 5.484,-0.05 6.234,-0.8 6.566,-0.8 6.716,-0.95 7.428,-0.95 7.978,-0.4 v1(11.2,-0.4)
FMC_A10: DD1.N7 DD3.G7 | length 11.2
  Top Layer w0.1: DD3.G7@8.4,-0.8 v1(8.8,-1.2)
  Top Layer w0.125: DD1.N7@-3.5,-0.8 v1(-3.1,-1.2)
  Int5 w0.1: -0.784,-1.55 7.036,-1.55 7.436,-1.15 7.511,-1.15 7.811,-0.85 8.401,-0.85 8.751,-1.2 v1(8.8,-1.2)
FMC_A11: DD1.M7 DD3.G9 | length 12.1
  Top Layer w0.1: v1(6.4,-1.2) DD3.G9@6.8,-0.8
  Top Layer w0.125: DD1.M7@-4.3,-0.8 v1(-3.9,-1.2)
  Int5 w0.1: v1(-3.9,-1.2) -3.5,-0.8 -1.866,-0.8 -1.516,-0.45 5.602,-0.45 6.352,-1.2 v1(6.4,-1.2)
FMC_BA0: DD1.N12 DD3.J7 | length 14.8
  Top Layer w0.1: DD3.J7@8.4,0.8 v1(8.8,0.4)
  Top Layer w0.125: DD1.N12@-3.5,3.2 v1(-3.1,3.6)
  Int5 w0.1: v1(-3.1,3.6) 6.2,3.6 6.8,3 6.8,2.705 7.505,2 7.695,2 8.4,1.295 8.4,0.8 v1(8.8,0.4)
FMC_BA1: DD1.N11 DD3.H8 | length 12.8
  Top Layer w0.1: v1(7.2,-0.4) DD3.H8@7.6,0
  Top Layer w0.125: DD1.N11@-3.5,2.4 v1(-3.1,2.8)
  Int5 w0.1: v1(-3.1,2.8) 4,2.8 v1(7.2,-0.4)